# EAGLE board FAN PCB DESIGN111 (002) (EAGLE 9.6.2)
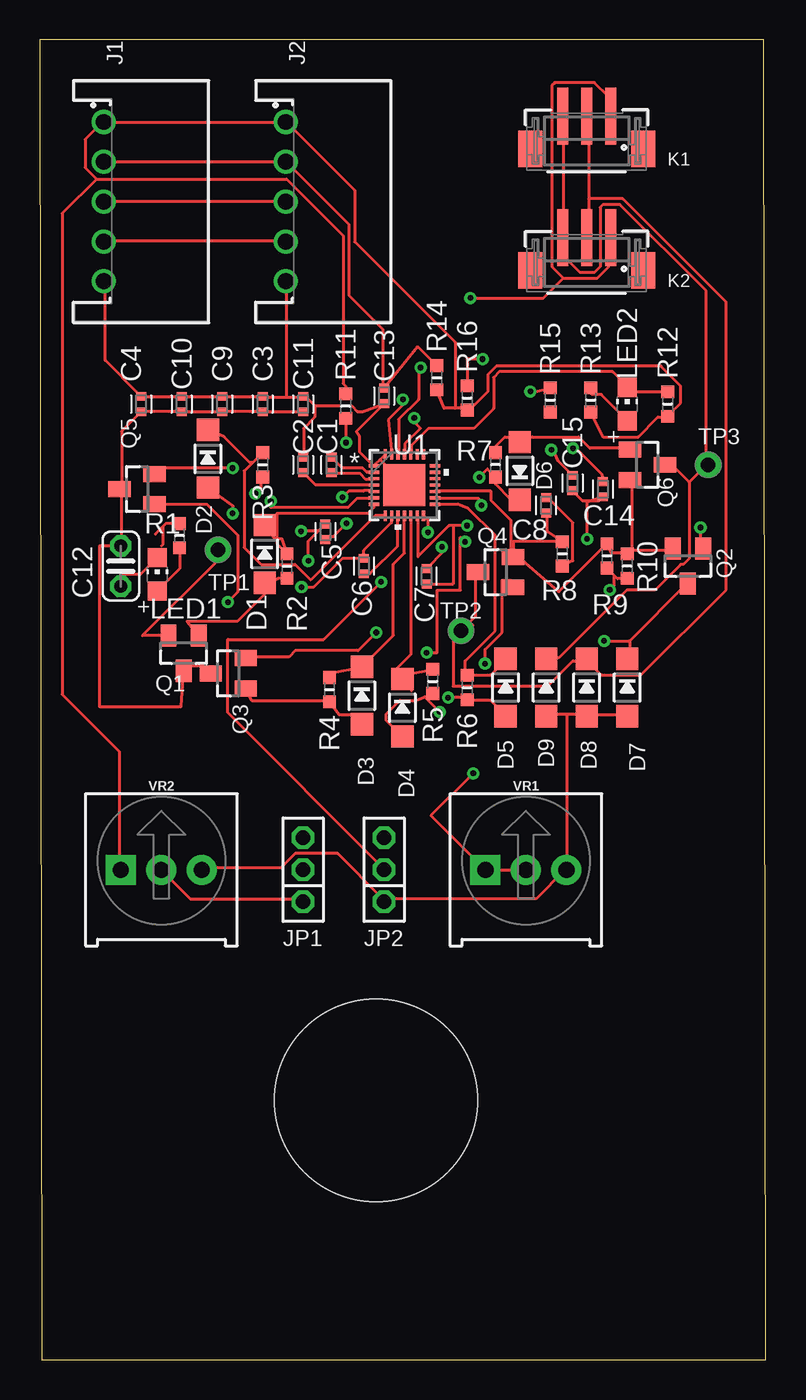
[diagram p0: board, top side]
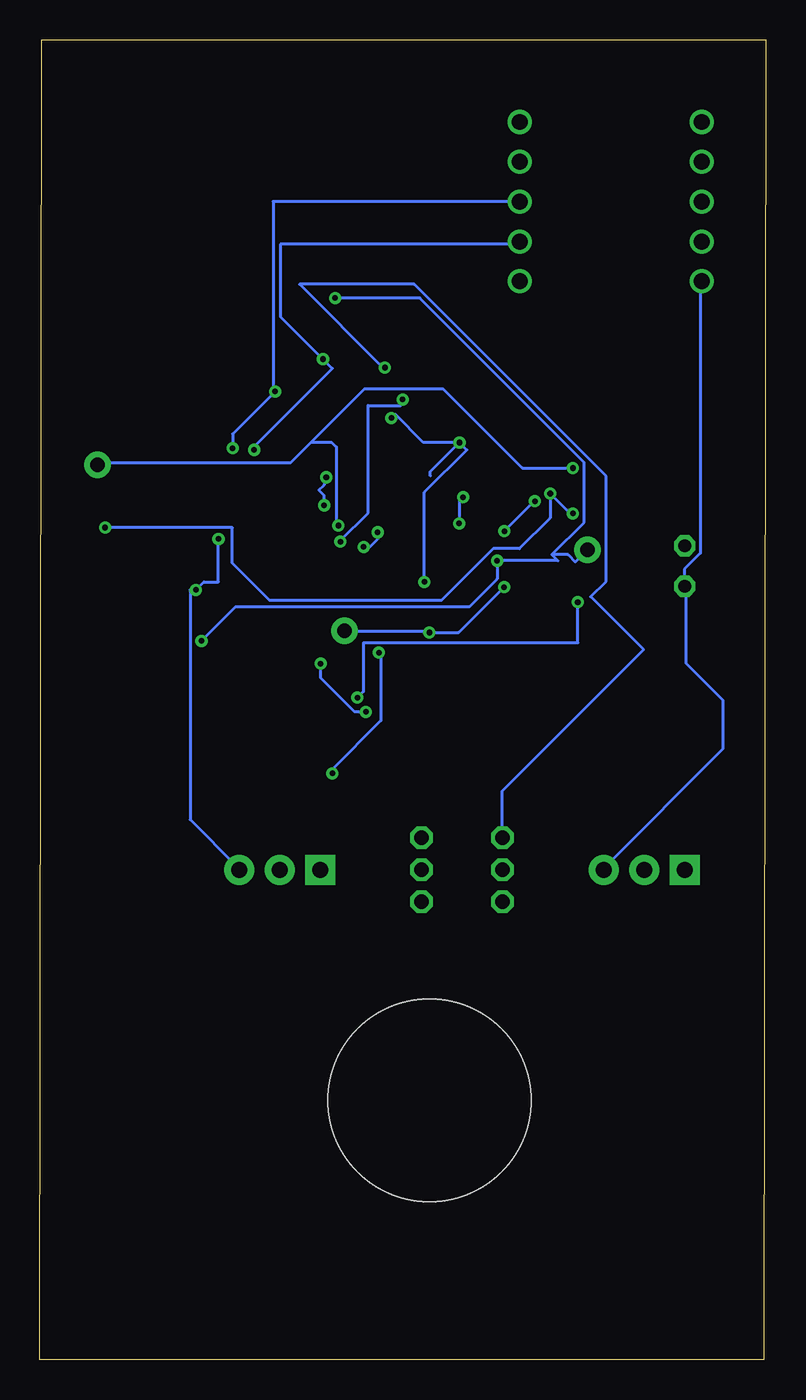
[diagram p1: board, bottom side, seen from below]

Size 45.52 x 82.79 mm. Coordinates in mm from the lower left corner, seen from the top.
Outline: 0.13,0 45.52,0 45.39,82.79 0,82.79 0.13,0
Copper layers (1*16): Top 0.035mm / dielectric 1.5mm / Bottom 0.035mm
Design rules "default *": minimum track width 8mil, minimum drill 0.35mm, track to track 6mil, track to pad 6mil, pad to pad 6mil, via to via 6mil, smd to smd 6mil, copper to edge 40mil, drill to drill 6mil, minimum pad ring 10mil, minimum via ring 8mil, stop-mask expansion 4mil, vias tented up to drill 0mil, thermal gap 10mil
Holes 12.7 mm at 21.08,16.26

## Footprints (pad centres in the part's own frame; a part is rotated, then mirrored left to right if it is on the bottom)
CAPC1005X60 = smd 0.56 x 0.629: 1 -0.485,0; 2 0.485,0
C025-024X044 = drill 0.813 octagon: 1 -1.27,0; 2 1.27,0
DIODE_SOD123 = smd 1.4 x 1.4: A 1.805,0; C -1.805,0
68800511722 = drill 1: 1 5,2.35; 2 2.5,2.35; 3 0,2.35; 4 -2.5,2.35; 5 -5,2.35
JUMPERS_JP2-2MM = drill 0.914 octagon: 1 -2,0; 2 0,0; 3 2,0
679303124022 = smd 0.7 x 3.6: 1 -1.5,-1.55; 2 0,-1.55; 3 1.5,-1.55 | smd 1.5 x 2.3: Z1 -3.55,0.5; Z2 3.55,0.5
CHIP-LED0805 = smd 1.2 x 1.2: A 0,-1.05; C 0,1.05
TRANSISTOR-FET_SOT23 = smd 1 x 1.4: 1 -0.95,-1.1; 2 0.95,-1.1; 3 0,1.1
RC-MASTER-SMD_R0603MP = smd 0.8 x 0.8: 1 -0.762,0; 2 0.762,0
TESTPOINT_PAD-036 = drill 0.914 pad 1.676: 1 0,0
IC28_MP6532_MNP-L = smd 0.66 x 0.203: 1 -1.918,1.2; 2 -1.918,0.8; 3 -1.918,0.4; 4 -1.918,0; 5 -1.918,-0.4; 6 -1.918,-0.8; 7 -1.918,-1.2; 15 1.918,-1.2; 16 1.918,-0.8; 17 1.918,-0.4; 18 1.918,0; 19 1.918,0.4; 20 1.918,0.8; 21 1.918,1.2 | smd 0.203 x 0.66: 8 -1.2,-1.918; 9 -0.8,-1.918; 10 -0.4,-1.918; 11 0,-1.918; 12 0.4,-1.918; 13 0.8,-1.918; 14 1.2,-1.918; 22 1.2,1.918; 23 0.8,1.918; 24 0.4,1.918; 25 0,1.918; 26 -0.4,1.918; 27 -0.8,1.918; 28 -1.2,1.918 | smd 2.642 x 2.642: 29 0,0
TRIMPOT-PTH-3386U = drill 1.016 pad 1.88 square: 1 -2.54,-0.015 | drill 1.016 pad 1.88: 2 0,-0.015; 3 2.54,-0.015

## Placement (x,y rotation side)
C1  1uF  [CAPC1005X60]  18.29,56.13 270 top
C2  1uF  [CAPC1005X60]  16.51,56.13 90 top
C3  1uF  [CAPC1005X60]  13.97,59.94 90 top
C4  100nF  [CAPC1005X60]  6.35,59.94 90 top
C5  1uF  [CAPC1005X60]  17.91,51.94 90 top
C6  1uF  [CAPC1005X60]  20.32,49.78 90 top
C7  1uF  [CAPC1005X60]  24.26,49.15 270 top
C8  1uF  [CAPC1005X60]  31.75,53.59 270 top
C9  1uF  [CAPC1005X60]  11.43,59.94 90 top
C10  1uF  [CAPC1005X60]  8.89,59.94 90 top
C11  1uF  [CAPC1005X60]  16.51,59.94 90 top
C12  100uF  [C025-024X044]  5.08,49.78 270 top
C13  10nF  [CAPC1005X60]  21.59,60.45 90 top
C14  10nF  [CAPC1005X60]  35.31,54.61 90 top
C15  10nF  [CAPC1005X60]  33.4,54.99 90 top
D1  0.7V  [DIODE_SOD123]  14.1,50.55 270 top
D2  0.7V  [DIODE_SOD123]  10.54,56.52 270 top
D3  0.7  [DIODE_SOD123]  20.19,41.66 270 top
D4  0.7V  [DIODE_SOD123]  22.73,40.89 270 top
D5  0.7V  [DIODE_SOD123]  29.21,42.16 270 top
D6  0.7V  [DIODE_SOD123]  30.1,55.75 90 top
D7  0.7V  [DIODE_SOD123]  36.83,42.16 270 top
D8  0.7V  [DIODE_SOD123]  34.29,42.16 270 top
D9  0.7V  [DIODE_SOD123]  31.75,42.16 270 top
J1  68800511722  [68800511722]  6.35,72.64 90 top
J2  68800511722  [68800511722]  17.78,72.64 90 top
JP1  JUMPERS_JP2-2MM  [JUMPERS_JP2-2MM]  16.51,30.73 90 top
JP2  JUMPERS_JP2-2MM  [JUMPERS_JP2-2MM]  21.59,30.73 90 top
K1  679303124022  [679303124022]  34.29,76.45 180 top
K2  679303124022  [679303124022]  34.29,68.83 180 top
LED1  [CHIP-LED0805]  7.37,49.28 0 top
LED2  [CHIP-LED0805]  36.83,59.94 0 top
Q1  TRANSISTOR-FET_DMP2004K  [TRANSISTOR-FET_SOT23]  9.02,44.32 180 top
Q2  TRANSISTOR-FET_DMP2004K  [TRANSISTOR-FET_SOT23]  40.64,49.78 180 top
Q3  TRANSISTOR-FET_DMP2004K  [TRANSISTOR-FET_SOT23]  11.81,43.05 90 top
Q4  TRANSISTOR-FET_DMP2004K  [TRANSISTOR-FET_SOT23]  28.57,49.4 90 top
Q5  TRANSISTOR-FET_DMP2004K  [TRANSISTOR-FET_SOT23]  6.1,54.61 90 top
Q6  TRANSISTOR-FET_DMP2004K  [TRANSISTOR-FET_SOT23]  38.1,56.13 270 top
R1  10k  [RC-MASTER-SMD_R0603MP]  8.76,51.69 270 top
R2  22  [RC-MASTER-SMD_R0603MP]  15.49,49.78 90 top
R3  22  [RC-MASTER-SMD_R0603MP]  13.97,56.13 90 top
R4  22  [RC-MASTER-SMD_R0603MP]  18.16,42.04 90 top
R5  22  [RC-MASTER-SMD_R0603MP]  24.64,42.55 90 top
R6  22  [RC-MASTER-SMD_R0603MP]  26.8,42.16 90 top
R7  22  [RC-MASTER-SMD_R0603MP]  28.57,56.13 270 top
R8  50m  [RC-MASTER-SMD_R0603MP]  32.77,50.55 270 top
R9  50m  [RC-MASTER-SMD_R0603MP]  35.56,50.42 270 top
R10  50m  [RC-MASTER-SMD_R0603MP]  36.83,49.78 270 top
R11  4.7k  [RC-MASTER-SMD_R0603MP]  19.18,59.82 270 top
R12  4.7k  [RC-MASTER-SMD_R0603MP]  39.37,59.94 90 top
R13  1k  [RC-MASTER-SMD_R0603MP]  34.54,60.2 90 top
R14  4.7k  [RC-MASTER-SMD_R0603MP]  24.89,61.59 90 top
R15  4.7k  [RC-MASTER-SMD_R0603MP]  32,60.2 90 top
R16  4.7k  [RC-MASTER-SMD_R0603MP]  26.8,60.33 90 top
TP1  TESTPOINT_TPS-PAD-036  [TESTPOINT_PAD-036]  11.18,50.8 0 top
TP2  TESTPOINT_TPS-PAD-036  [TESTPOINT_PAD-036]  26.42,45.72 0 top
TP3  TESTPOINT_TPS-PAD-036  [TESTPOINT_PAD-036]  41.91,56.13 0 top
U1  MP6532IC28_MP6532_MNP-L  [IC28_MP6532_MNP-L]  22.86,54.86 0 top
VR1  500k  [TRIMPOT-PTH-3386U]  30.48,30.73 0 top
VR2  500k  [TRIMPOT-PTH-3386U]  7.62,30.73 0 top

## Library data of the parts
C1-C11 C13-C15 = Capacitor; CATEGORY: Capacitor
C12 = BeagleBone_Black_Wireless
D1-D9 Q1-Q6 R1-R16 = 52101-101-REV-A_v16
J1 J2 = Wurth_Connectors_WR-WTB; CONTACT-RESISTANCE: 20mOhm; DATASHEET-URL: https://www.we-online.com/catalog/datasheet/68800511722.pdf; GENDER: Male; IR: 3A; L: 15mm; MOUNT: THT; PACKAGING: Bag; PART-NUMBER: 68800511722; PCB-CABLE-PANEL: PCB; PINS: 5; PITCH: 2.5mm; TOL-R: max.; TYPE: Horizontal; USE-WITH: WR-WTB 2.50 mm J Type Female Terminal Housing; WORKING-VOLTAGE: 250V(AC)
JP1 JP2 = LinkedLibrary52101
K1 K2 = Wurth_Connectors_WR-WTB; CONTACT-RESISTANCE: 20mOhm; DATASHEET-URL: https://www.we-online.com/catalog/datasheet/679303124022.pdf; GENDER: Male; IR: 1A; L: 7.5mm; MOUNT: SMT; PACKAGING: Tape and Reel with Cap; PART-NUMBER: 679303124022; PCB-CABLE-PANEL: PCB; PINS: 3; PITCH: 1.5mm; TOL-R: max.; TYPE: Vertical; USE-WITH: WR-WTB 1.50 mm Female Terminal Housing; WORKING-VOLTAGE: 50V(AC)
LED1 LED2 = adafruit
TP1-TP3 = LinkedLibrary52101; BOM: EXCLUDE
U1 = mp6532 footprint; BUILT_BY: EMA_Kyle; COPYRIGHT: Copyright (C) 2018 Accelerated Designs. All rights reserved; DATASHEET: https://www.monolithicpower.com/en/documentview/productdocument/index/version/2/document_type/Datasheet/lang/en/sku/MP6532/document_id/1845/; MANUFACTURER_PART_NUMBER: MP6532; SOURCELIBRARY: Monolithic_Power_Systems_2020-09-28; VENDOR: Monolithic Power Systems Inc
VR1 VR2 = SparkFun-Resistors; PROD_ID: RES-09730; SF_SKU: COM-09806

## Nets
GND: C2.2 C3.2 C4.2 C9.2 C10.2 C11.2 C12.2 C13.1 C14.1 C15.1 D7.A D8.A D9.A J1.5 J2.5 JP2.1 LED1.C R1.1 R9.2 R10.2 U1.1 U1.28 U1.29 VR1.3 VR2.3
HALLU: C13.2 J1.2 J2.2 R14.2
HALLV: C14.2 J1.3 J2.3 R15.2
HALLW: C15.2 J1.4 J2.4 R16.2
N$1: U1.27 VR1.1 VR1.2
N$2: C1.1 U1.2
N$3: C1.2 U1.3
N$4: C2.1 U1.4
N$5: JP1.1 VR2.2
N$6: JP1.3 U1.26
N$7: C7.1 U1.14
N$8: LED1.A R1.2
N$10: D1.C R2.2 U1.7
N$11: C5.2 D7.C K1.1 K2.1 Q1.2 Q2.3 TP1.1 U1.6
N$12: C5.1 U1.5
N$13: D2.A Q2.1 R3.1
N$14: D1.A Q1.1 R2.1
N$15: D2.C R3.2 U1.8
N$16: D3.C R4.2 U1.11
N$17: D3.A Q3.1 R4.1
N$18: LED2.A R13.2
N$19: C6.2 D8.C K1.2 K2.2 Q3.2 Q4.3 TP2.1 U1.9
N$20: C6.1 U1.10
N$22: D4.C R5.2 U1.12
N$23: D4.A Q4.1 R5.1
N$24: C7.2 D9.C K1.3 K2.3 Q5.2 Q6.3 TP3.1 U1.13
N$26: D5.C R6.2 U1.15
N$27: D5.A Q5.1 R6.1
N$28: D6.C R7.2 U1.16
N$29: D6.A Q6.1 R7.1
N$30: C8.2 Q2.2 Q4.2 Q6.2 R8.1 R9.1 R10.1 U1.17
N$36: C8.1 R8.2
NFAULT: LED2.C R12.2 U1.24
NSLEEP: JP2.2 R11.2 U1.25
S$1: R15.1
VCC3V3: J1.1 J2.1 R11.1 R12.1 R13.1 R14.1 R16.1 VR2.1
VIN: C3.1 C4.1 C9.1 C10.1 C11.1 C12.1 Q1.3 Q3.3 Q5.3

## Tracks (layer width: path | path; a pad name or v marks a point on that pad's centre or on a via)
GND  (via drill 0.35)
  Top 0.203: R1.1 7.9,52.45 7.7,52.25 | 7.24,51.79 7.7,52.25 | LED1.C 6.29,49.25 5.08,49.25 C12.2 | 21.34,56.46 21.69,56.82 U1.28 | 21.34,56.46 20.98,56.11 U1.1 20.04,56.97 20.04,57.93 19.84,58.22 C13.1 20.25,59.49 19.91,59.49 19.56,59.84 17.25,59.84 | 21.34,56.46 22.94,54.86 U1.29 | 17.25,59.84 17.25,59.13 16.54,58.42 16.54,56.64 C2.2 | 17.25,59.84 16.54,60.55 C11.2 16.36,60.38 15.47,60.38 | 8.89,60.38 6.4,60.38 C4.2 6.22,60.55 4.09,62.69 4.09,67.49 J1.5 | 8.89,60.38 11.38,60.38 C9.2 11.56,60.38 13.87,60.38 C3.2 14.05,60.38 15.47,60.38 | 8.89,60.38 C10.2 | 15.47,60.38 15.47,67.49 J2.5 | C15.1 34.04,53.87 35.05,53.87 C14.1 34.31,53.79 v34.31,51.49 | 33.07,40.46 34.14,40.46 D8.A 34.31,40.46 36.8,40.46 D7.A | 33.07,40.46 31.83,40.46 D9.A | R9.2 36.22,49 36.8,49 R10.2 | v35.74,48.28 35.99,48.54 35.99,49.12 | 33.07,40.46 33.07,30.86 VR1.3 32.89,30.68 31.11,28.91 21.69,28.91 JP2.1 21.51,28.91 18.67,31.75 16,31.75 15.11,30.86 10.31,30.86 VR2.3 | 7.7,52.25 | 7.7,52.25 7.7,51.13 7.62,51.05
  Bottom 0.203: J1.5 4.09,67.49 4.09,50.6 5.11,49.58 5.11,48.54 C12.2 4.98,48.46 4.98,43.66 2.67,41.35 2.67,38.33 10.13,30.86 VR2.3 | VR1.3 33.07,30.86 36.09,33.88 36.09,48.28 v35.74,48.28 35.23,48.79 34.31,48.79 v34.31,51.49
HALLU
  Top 0.203: R14.2 23.71,63.54 C13.2 21.51,61.06 21.51,64.64 19.38,66.78 19.38,71.22 15.47,75.13 J2.2 15.29,75.13 4.09,75.13 J1.2
HALLV  (via drill 0.35)
  Top 0.203: v33.43,57.17 33.6,57.17 35.24,55.54 C14.2 | v30.76,60.73 31.09,60.73 R15.2 | J2.3 J1.3
  Bottom 0.203: v33.43,57.17 33.43,58.06 v30.76,60.73 30.89,60.86 30.89,72.64 J2.3
HALLW  (via drill 0.35)
  Top 0.203: C15.2 32.5,56.38 32.18,57.17 v32.08,57.07 | v27.76,62.76 26.8,62.76 R16.2 | J1.4 4.09,70.16 15.29,70.16 J2.4
  Bottom 0.203: v32.08,57.07 32.08,57.28 27.18,62.18 v27.76,62.76 30.43,65.43 30.43,69.98 15.47,69.98 J2.4
N$1  (via drill 0.35)
  Top 0.203: VR1.2 30.4,30.68 28.09,30.68 VR1.1 24.53,34.13 v27.18,36.78 27.18,36.96 | v24.26,44.35 24.89,44.35 24.89,48.26 26.38,48.26 26.38,51.6 v26.67,51.31 | v22.77,60.23 22.94,60.06 21.85,58.96 U1.27
  Bottom 0.203: v24.26,44.35 24.13,44.22 24.13,40.08 27.18,37.04 v27.18,36.78 | v26.67,51.31 26.67,51.38 24.93,53.12 24.93,59.85 22.9,59.85 22.77,59.98 v22.77,60.23
N$2
  Top 0.203: U1.2 20.51,55.66 20.24,55.93 18.98,55.93 C1.1
N$3
  Top 0.203: C1.2 18.44,55.58 20.09,55.58 20.45,55.22 20.8,55.22 U1.3
N$4
  Top 0.203: C2.1 17.3,54.86 U1.4
N$5
  Top 0.203: JP1.1 16.36,28.91 9.42,28.91 7.64,30.68 VR2.2
N$6  (via drill 0.35)
  Top 0.203: U1.26 22.5,56.83 22.5,59 23.75,60.24 23.75,62.23 v23.88,62.23
  Bottom 0.203: JP1.3 16.51,35.68 7.65,44.54 10.97,47.86 10.01,48.82 10.01,55.42 22.04,67.45 29.23,67.45 24,62.23 v23.88,62.23
N$7  (via drill 0.35)
  Top 0.203: U1.14 24.34,52.67 v24.34,51.9 | v25.21,50.99 25.34,50.99 25.34,50.72 C7.1
  Bottom 0.203: v24.34,51.9 24.34,51.48 24.83,50.99 v25.21,50.99
N$8
  Top 0.203: R1.2 8.76,49.62 LED1.A
N$10
  Top 0.203: D1.C 14.74,51.49 15.18,51.49 R2.2 14.86,51.18 14.86,53.09 20.57,53.09 20.94,53.45 U1.7
N$11  (via drill 0.35)
  Top 0.203: 32.82,67.84 34.95,67.84 35.66,68.56 35.66,70.33 K2.1 | 32.82,67.84 32.11,68.56 32.11,79.93 32.28,80.11 34.77,80.11 35.66,79.22 35.66,78.16 K1.1 | 36.98,45.09 36.98,44.02 D7.C | 36.98,45.09 40.54,48.64 Q2.3 | v16.84,50.11 16.84,51.36 C5.2 17.45,51.97 v16.38,51.97 | TP1.1 11.18,50.16 6.43,45.42 Q1.2 | v35.38,45.09 36.98,45.09 | v27,66.6 31.57,66.6 32.82,67.84 | 20.89,54.02 20.9,54.03 U1.6 20.9,54.02 20.89,54.02 | 20.89,54.02 19.87,54.02 19.32,53.47 14.48,53.47 v14.48,53.85
  Bottom 0.203: 13.41,50.5 12.39,50.5 11.94,50.04 TP1.1 | 13.41,50.5 13.03,50.11 v16.84,50.11 16.84,48.97 18.57,47.24 33.22,47.24 v35.38,45.09 | v27,66.6 21.69,66.6 11.38,56.29 11.38,52.53 13.41,50.5 | v16.38,51.97 14.5,53.85 v14.48,53.85
N$12  (via drill 0.35)
  Top 0.203: C5.1 18.41,51.63 v19.23,52.45 | U1.5 20.8,54.51 20.32,54.51 20.3,54.49 19.36,54.49 v18.97,54.11
  Bottom 0.203: v18.97,54.11 19.23,54.11 v19.23,52.45
N$13  (via drill 0.35)
  Top 0.203: v13.51,54.33 13.87,54.69 13.87,55.22 R3.1 | v12.09,53.09 12.09,53.59 D2.A | v41.43,52.2 41.43,50.95 Q2.1
  Bottom 0.203: v12.09,53.09 12.27,53.09 v13.51,54.33 13.51,52.81 15.45,50.87 17.09,50.87 20.34,47.62 31.11,47.62 33.45,49.96 33.45,52.2 v41.43,52.2
N$14
  Top 0.203: R2.1 15.39,49.07 14.94,49 14.5,48.74 D1.A 14.1,48.03 12.37,46.3 9.24,46.3 Q1.1
N$15
  Top 0.203: 13.34,56.29 13.87,56.82 R3.2 | 13.34,56.29 12.8,55.75 12.8,50.95 13.87,49.89 16,49.89 16.98,48.91 21.02,52.95 U1.8 | 13.34,56.29 13.16,56.29 11.53,57.91 D2.C
N$16
  Top 0.203: R4.2 18.16,42.98 18.26,43.08 D3.C 22.17,45.44 22.17,49.9 22.86,50.59 U1.11
N$17
  Top 0.203: Q3.1 13.29,41.35 17.93,41.35 R4.1 18.77,40.46 20.04,40.46 D3.A
N$18
  Top 0.203: R13.2 34.61,60.55 35.2,60.55 36.8,58.95 LED2.A
N$19  (via drill 0.35)
  Top 0.203: 34.42,72.82 34.42,77.98 K1.2 | 34.42,72.82 34.42,70.51 K2.2 | U1.9 22.05,52.91 22.05,52.5 20.32,50.78 C6.2 18.98,50.27 17.17,48.46 v16.41,48.46 | Q3.2 12.91,44.09 15.63,44.09 16.02,44.47 19.95,44.47 v21.09,45.62 | 27.15,46.08 26.77,46.08 TP2.1 | 34.42,72.82 36.55,72.82 43.03,66.34 43.03,48.28 37.69,42.95 35.2,42.95 34.31,43.84 D8.C 34.14,43.84 33.43,43.84 31.83,42.24 25.91,42.24 25.91,45.21 TP2.1 | 27.3,49.02 27.3,46.61 TP2.1
  Bottom 0.203: TP2.1 20.99,45.72 v21.09,45.62 19.26,45.62 v16.41,48.46
N$20
  Top 0.203: C6.1 20.7,49.3 22.42,51.02 22.42,52.91 U1.10
N$22
  Top 0.203: R5.2 22.63,42.91 22.27,43.26 23.26,44.25 U1.12 | 23.31,41.97 D4.C
N$23  (via drill 0.35)
  Top 0.203: D4.A 21.69,40.11 21.69,40.46 22.58,41.35 23.56,41.35 R5.1 24.13,41.58 v25.07,40.64 | v27.91,43.66 27.91,44.55 28.98,45.62 28.98,48.9 29.55,48.9
  Bottom 0.203: v27.91,43.66 27.91,42.77 25.78,40.64 v25.07,40.64
N$24  (via drill 0.35)
  Top 0.203: K1.3 32.82,77.98 32.82,70.51 K2.3 32.82,70.33 32.82,69.27 33.88,68.2 34.77,68.2 35.13,68.56 35.13,72.29 35.31,72.47 36.37,72.47 41.78,67.06 41.78,56.29 TP3.1 41.78,56.11 40.72,55.04 | C7.2 25.91,48.66 25.91,52.32 v26.8,52.32 25.65,52.32 23.7,50.37 23.7,52.9 U1.13 | v12.09,55.93 7.74,55.93 Q5.2 | 40.72,55.04 40.72,50.24 40.36,49.89 40.18,49.89 38.58,48.28 36.8,48.28 32.54,44.02 31.83,44.02 D9.C | 40.72,55.04 39.65,56.11 39.29,56.11 Q6.3
  Bottom 0.203: v12.09,55.93 15.27,55.93 20.24,60.91 25.15,60.91 28.5,57.56 | 28.5,57.56 29.77,56.29 41.78,56.29 TP3.1 | 28.5,57.56 27.23,57.56 26.92,57.25 26.92,52.45 v26.8,52.32
N$26
  Top 0.203: U1.15 26.16,53.66 26.88,53.39 28.55,51.71 28.55,45.72 26.67,43.84 26.67,42.95 26.8,42.95 | 26.8,42.95 28.27,42.95 29.16,43.84 D5.C | 26.8,42.95 R6.2
N$27  (via drill 0.35)
  Top 0.203: D5.A 29.16,40.46 28.27,41.35 26.8,41.35 R6.1 26.8,41.53 v25.6,41.53 | v11.79,47.52 12.42,48.16 12.42,51.71 10.47,53.66 Q5.1
  Bottom 0.203: v11.79,47.52 11.79,44.98 25.22,44.98 25.22,41.91 v25.6,41.53
N$28  (via drill 0.35)
  Top 0.203: D6.C 29.52,53.97 28.57,54.91 R7.2 28.07,55.88 28.07,55.86 v27.56,55.35 | U1.16 24.81,54.03 24.84,54.02 27.51,54.02 27.69,53.85 v27.69,53.59
  Bottom 0.203: v27.69,53.59 27.69,54.21 28.02,54.53 27.69,54.86 27.69,55.22 v27.56,55.35
N$29
  Top 0.203: R7.1 28.57,57.3 29.16,57.89 29.76,57.89 D6.A 30.89,57.89 33.78,57.89 34.49,57.17 36.98,57.17 Q6.1
N$30
  Top 0.203: R10.1 36.8,50.6 35.85,50.6 R9.1 32.55,48.17 29.57,50.76 29.57,50.86 | 37.16,50.78 39.65,50.78 Q2.2 | 37.16,50.78 36.98,50.6 R10.1 | 37.16,50.78 37.16,55.04 Q6.2 | 37.16,50.78 R10.1 | C8.2 31.83,53.03 31.83,51.93 R8.1 29.68,51.31 Q4.2 | 29.55,50.23 29.55,52.64 28.28,53.91 28.28,54.48 24.83,54.48 U1.17
N$36
  Top 0.203: C8.1 31.78,54.14 33.43,52.5 33.43,50.11 R8.2
NFAULT
  Top 0.203: U1.24 23.29,56.82 23.29,57.35 24.36,58.42 27.2,58.42 28.45,59.67 28.45,61.62 28.8,61.98 35.92,61.98 36.8,61.09 LED2.C 36.98,60.91 37.16,60.73 39.29,60.73 R12.2
NSLEEP  (via drill 0.35)
  Top 0.203: v19.2,57.53 19.2,59.05 R11.2 | JP2.2 21.51,30.86 11.79,40.59 11.79,45.19 17.8,45.19 v21.4,48.79 | v23.48,59.07 23.6,58.95 23.6,58.69 23.86,58.44 23.86,58.42 22.89,57.46 22.89,56.81 U1.25
  Bottom 0.203: v19.2,57.53 18.75,57.07 21.4,54.41 v21.4,48.79 | 21.02,55.43 21.02,55.71 v19.2,57.53 | v19.2,57.53 21.46,57.53 23.24,59.31 v23.48,59.07
S$1
  Top 0.203: 32.08,59.31 R15.1
VCC3V3
  Top 0.203: 27.05,59.69 26.04,59.69 | 26.04,59.69 25.35,59.69 R14.1 | 34.39,59.56 R13.1 35.32,57.89 37.52,57.89 38.76,59.13 39.29,59.13 R12.1 39.47,59.31 40.18,60.02 40.18,61.09 38.94,62.33 28.63,62.33 28.09,61.8 28.09,60.73 27.05,59.69 | 27.05,59.69 26.8,59.44 R16.1 | 3.56,74.07 15.47,74.07 19.02,70.51 19.02,61.24 19.18,61.09 R11.1 | 3.56,74.07 2.85,74.78 2.85,76.56 3.91,77.62 J1.1 4.09,77.62 15.29,77.62 J2.1 15.47,77.62 19.74,73.36 19.74,70.13 26.04,63.83 26.04,59.69 | 3.56,74.07 1.4,71.91 1.4,41.73 4.98,38.15 4.98,30.86 VR2.1
VIN
  Top 0.203: C11.1 16.36,59.49 14.05,59.49 C3.1 13.87,59.49 11.56,59.49 C9.1 11.38,59.49 8.89,59.49 | 8.89,59.49 6.4,59.49 C4.1 5.13,58.24 5.13,54.61 | 8.89,59.49 C10.1 | Q3.3 10.25,43.51 9.02,43.51 Q1.3 8.87,40.97 3.73,40.97 3.73,51.05 C12.1 5.13,51.11 5.13,54.61 | 5.13,54.61 Q5.3